# EAGLE board axiom_beta_plugin_module_TE0714_SDI_v0.4 (EAGLE 7.7.0)
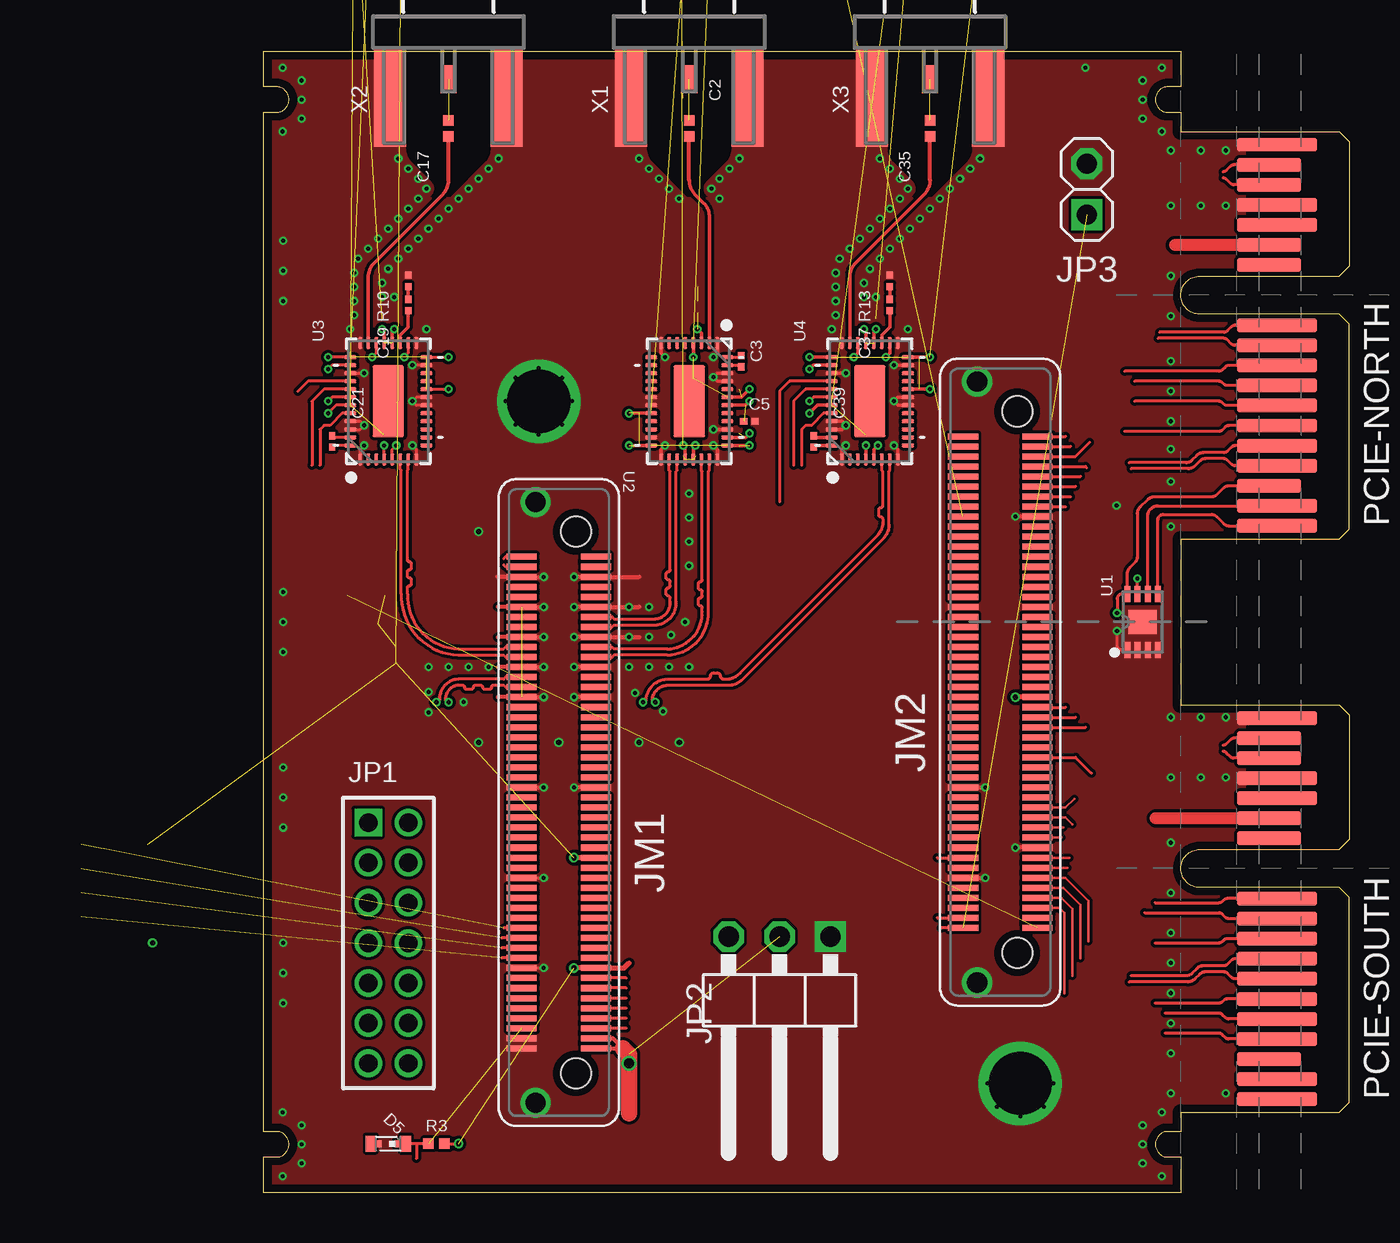
[diagram p0: board, top side]
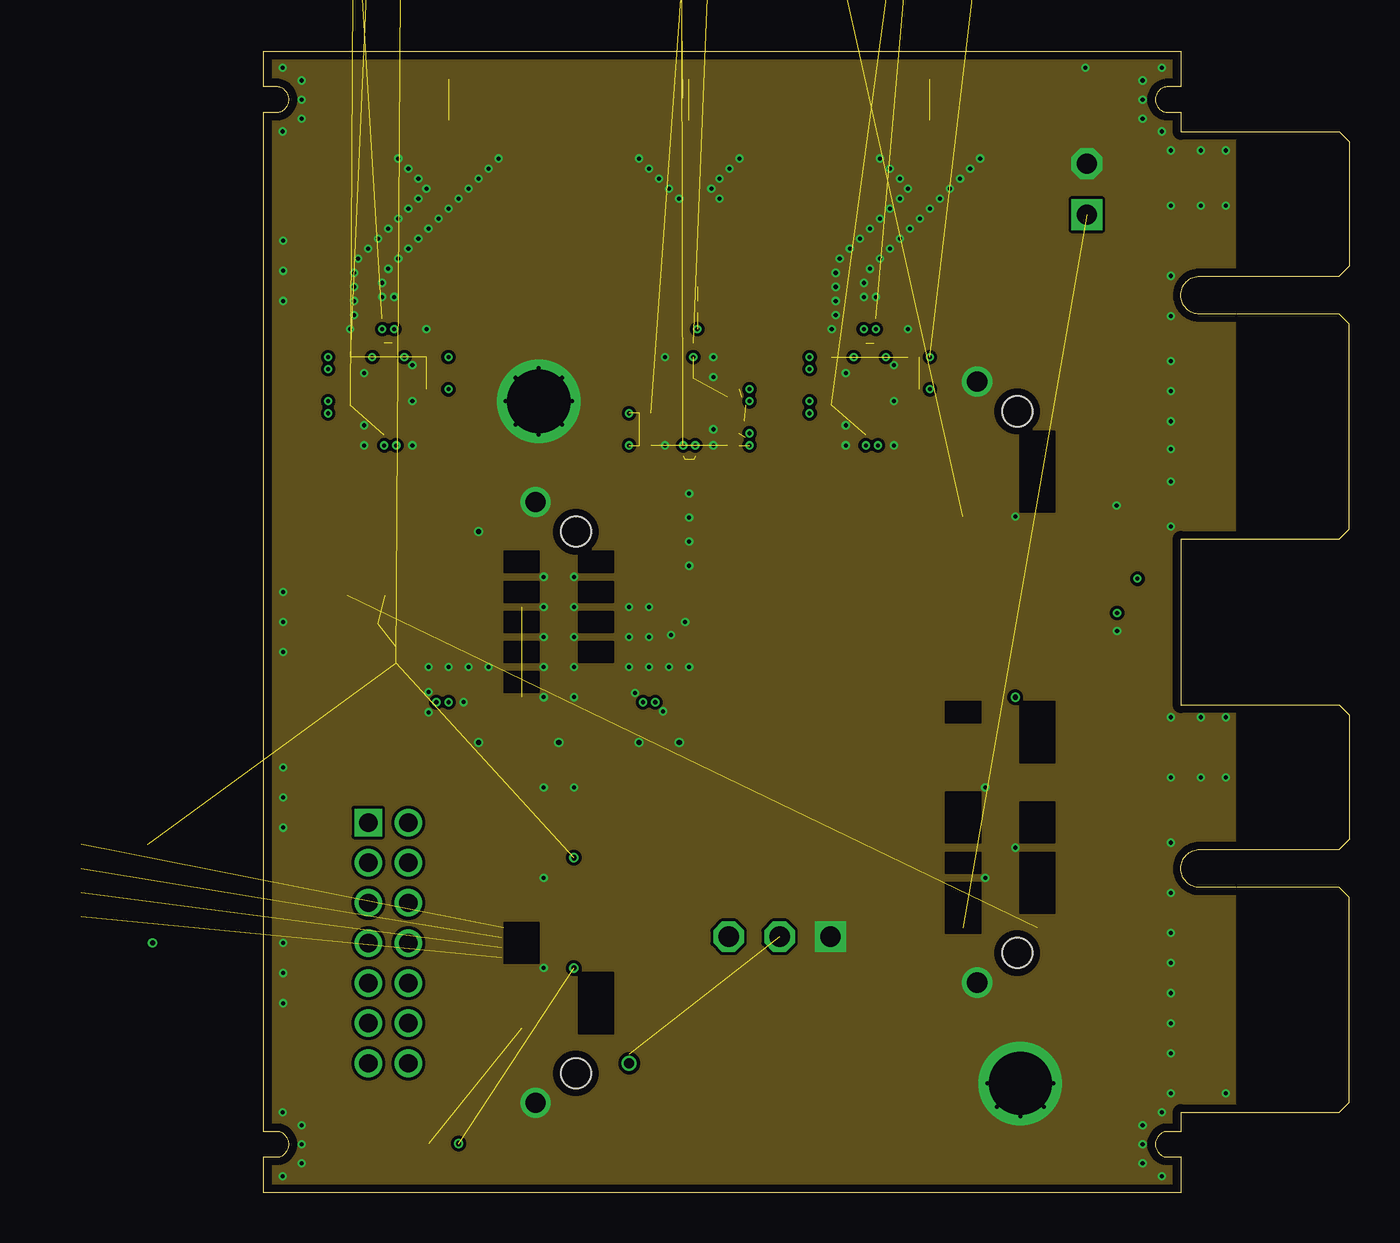
[diagram p1: board, inner layer Route2]
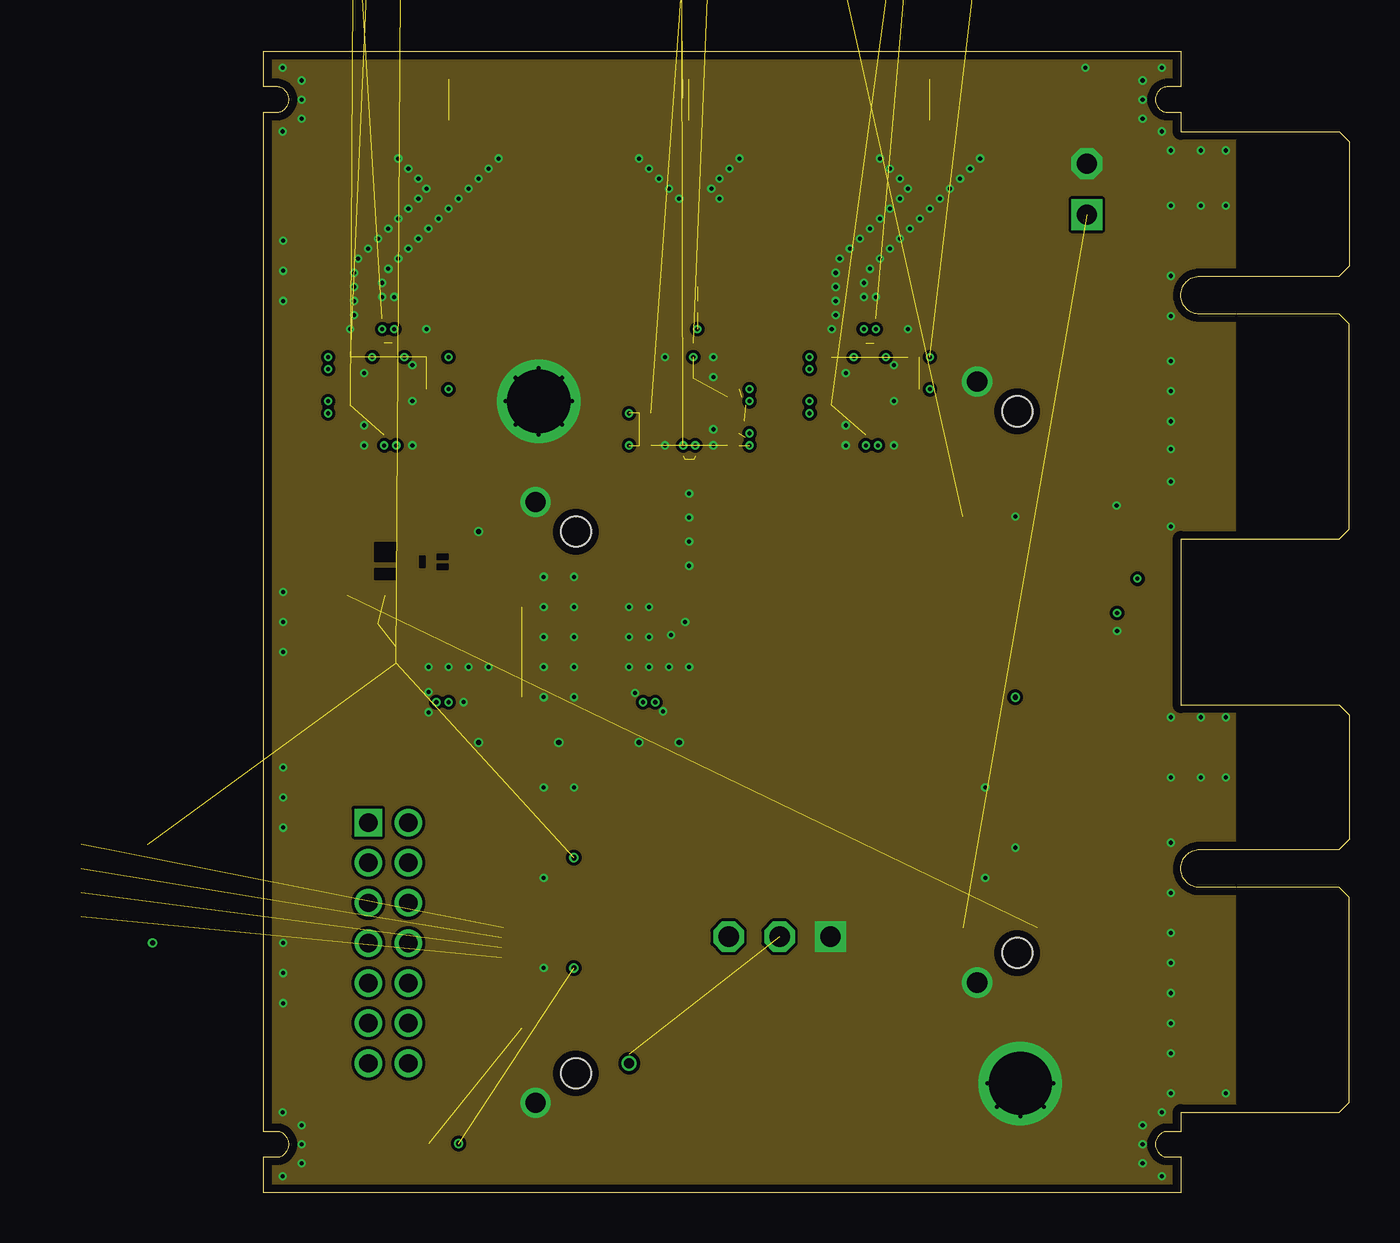
[diagram p2: board, inner layer Route15]
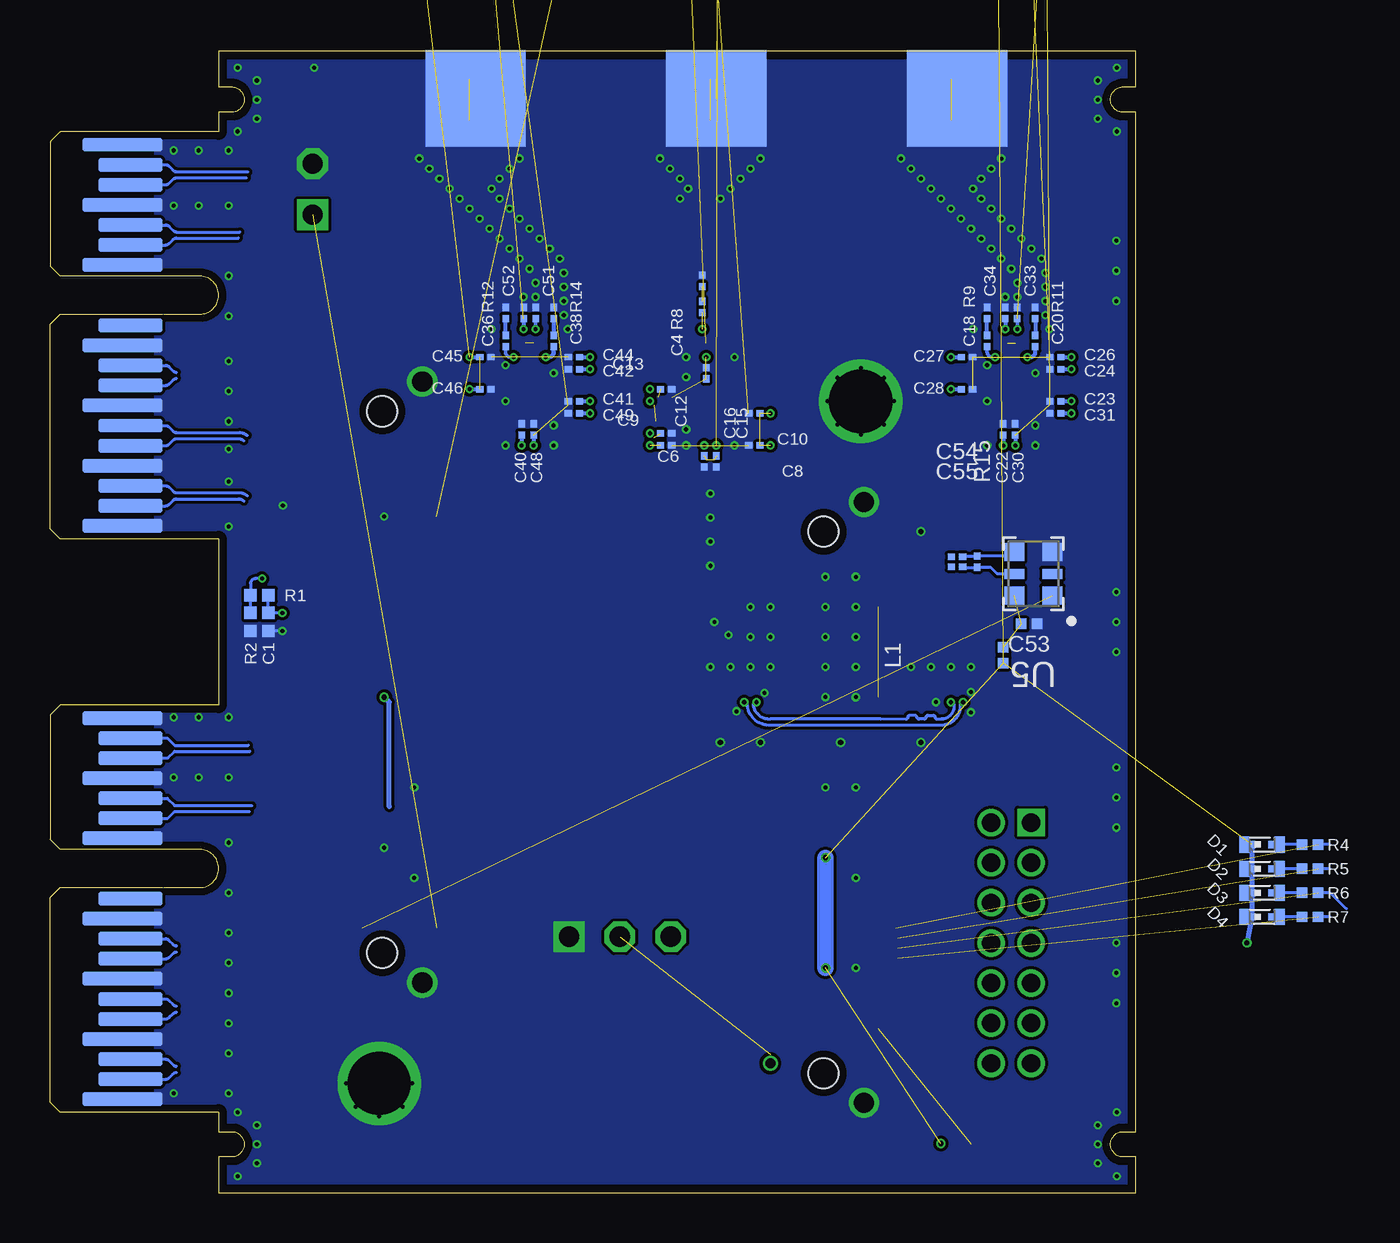
[diagram p3: board, bottom side, seen from below]

Size 54.12 x 56.9 mm. Coordinates in mm from the lower left corner, seen from the top.
Outline: 45.72,32.59 45.72,24.31
Outline: 45.72,52.89 45.72,53.85 45.09,53.85 arc-90 44.45,54.48 arc-90 45.09,55.12 45.72,55.12 45.72,56.9 0,56.9 0,55.12 0.63,55.12 arc-90 1.27,54.48 arc-90 0.63,53.85 0,53.85 0,3.05 0.63,3.05 arc-90 1.27,2.41 arc-90 0.63,1.78 0,1.78 0,0 45.72,0 45.72,1.78 45.09,1.78 arc-90 44.45,2.41 arc-90 45.09,3.05 45.72,3.05 45.72,4.01
Copper layers (1*2*15*16): Top 0.035559375mm / dielectric 0.17018125mm / Route2 0.01778125mm / dielectric 47mil / Route15 0.01778125mm / dielectric 0.17018125mm / Bottom 0.035559375mm
Design rules "OSHPark-4layer-tuned *": minimum track width 5mil, minimum drill 10mil, track to track 5mil, track to pad 5mil, pad to pad 5mil, via to via 5mil, smd to smd 5mil, copper to edge 15mil, drill to drill 6mil, minimum pad ring 4mil, minimum via ring 4mil, stop-mask expansion 2mil, vias tented up to drill 25mil, thermal gap 6mil
Net classes: 0 default: width 0.152 mm, drill 0.203 mm, clearance 0.152 mm; 1 LVDS: width 0.152 mm, drill 0.254 mm, clearance 0.152 mm; 2 75Ohm: width 0.178 mm, drill 0.203 mm, clearance 0.254 mm; 3 MGT: width 0.152 mm, drill 0.203 mm, clearance 0.356 mm
tKeepout: area 43.5,52.9 to 46.7,56.1; area 43.5,0.8 to 46.7,4; area -1,52.9 to 2.2,56.1; area -1,0.8 to 2.2,4
bKeepout: area 43.5,52.9 to 46.7,56.1; area 43.5,0.8 to 46.7,4; area -1,52.9 to 2.2,56.1; area -1,0.8 to 2.2,4

## Footprints (pad centres in the part's own frame; a part is rotated, then mirrored left to right if it is on the bottom)
0402-B = smd 0.62 x 0.62: 1 -0.45,0; 2 0.45,0
0402-C = smd 0.52 x 0.52: 1 -0.4,0; 2 0.4,0
0201-C = smd 0.36 x 0.32: 1 -0.28,0; 2 0.28,0
SMARTLED-TTW = smd 0.8 x 0.5: A 0,-0.875; C 0,0.875 | smd 0.35 x 0.35: A@1 0,-0.5; C@1 0,0.5
LSHM-150-XX.X-XX-DV-A-S = smd 0.3 x 1.5: 1 12.25,-1.85; 2 12.25,1.85; 3 11.75,-1.85; 4 11.75,1.85; 5 11.25,-1.85; 6 11.25,1.85; 7 10.75,-1.85; 8 10.75,1.85; 9 10.25,-1.85; 10 10.25,1.85; 11 9.75,-1.85; 12 9.75,1.85; 13 9.25,-1.85; 14 9.25,1.85; 15 8.75,-1.85; 16 8.75,1.85; 17 8.25,-1.85; 18 8.25,1.85; 19 7.75,-1.85; 20 7.75,1.85; 21 7.25,-1.85; 22 7.25,1.85; 23 6.75,-1.85; 24 6.75,1.85; 25 6.25,-1.85; 26 6.25,1.85; 27 5.75,-1.85; 28 5.75,1.85; 29 5.25,-1.85; 30 5.25,1.85; 31 4.75,-1.85; 32 4.75,1.85; 33 4.25,-1.85; 34 4.25,1.85; 35 3.75,-1.85; 36 3.75,1.85; 37 3.25,-1.85; 38 3.25,1.85; 39 2.75,-1.85; 40 2.75,1.85; 41 2.25,-1.85; 42 2.25,1.85; 43 1.75,-1.85; 44 1.75,1.85; 45 1.25,-1.85; 46 1.25,1.85; 47 0.75,-1.85; 48 0.75,1.85; 49 0.25,-1.85; 50 0.25,1.85; 51 -0.25,-1.85; 52 -0.25,1.85; 53 -0.75,-1.85; 54 -0.75,1.85; 55 -1.25,-1.85; 56 -1.25,1.85; 57 -1.75,-1.85; 58 -1.75,1.85; 59 -2.25,-1.85; 60 -2.25,1.85; 61 -2.75,-1.85; 62 -2.75,1.85; 63 -3.25,-1.85; 64 -3.25,1.85; 65 -3.75,-1.85; 66 -3.75,1.85; 67 -4.25,-1.85; 68 -4.25,1.85; 69 -4.75,-1.85; 70 -4.75,1.85; 71 -5.25,-1.85; 72 -5.25,1.85; 73 -5.75,-1.85; 74 -5.75,1.85; 75 -6.25,-1.85; 76 -6.25,1.85; 77 -6.75,-1.85; 78 -6.75,1.85; 79 -7.25,-1.85; 80 -7.25,1.85; 81 -7.75,-1.85; 82 -7.75,1.85; 83 -8.25,-1.85; 84 -8.25,1.85; 85 -8.75,-1.85; 86 -8.75,1.85; 87 -9.25,-1.85; 88 -9.25,1.85; 89 -9.75,-1.85; 90 -9.75,1.85; 91 -10.25,-1.85; 92 -10.25,1.85; 93 -10.75,-1.85; 94 -10.75,1.85; 95 -11.25,-1.85; 96 -11.25,1.85; 97 -11.75,-1.85; 98 -11.75,1.85; 99 -12.25,-1.85; 100 -12.25,1.85 | drill 1 pad 1.5: F1 14.975,1.15; F2 -14.975,1.15 | hole 1.5: -13.5,-0.85; 13.5,-0.85
2X07M = drill 0.914 square: 1 -6,-1 | drill 0.914: 2 -6,1; 3 -4,-1; 4 -4,1; 5 -2,-1; 6 -2,1; 7 0,-1; 8 0,1; 9 2,-1; 10 2,1; 11 4,-1; 12 4,1; 13 6,-1; 14 6,1
1X03/90-S = drill 1.016 square: 1 -2.54,-3.81 | drill 1.016 octagon: 2 0,-3.81; 3 2.54,-3.81
1X02-S = drill 1.016 square: 1 -1.27,0 | drill 1.016 octagon: 2 1.27,0
PCIE-36-AXIOM = smd 0.7 x 4 bottom: A1 -11.5,3.6; A4 -8.5,3.6; A7 -5.5,3.6; A10 -2.5,3.6; A12 1.5,3.6; A15 4.5,3.6; A18 7.5,3.6 | smd 0.7 x 3.2 bottom: A2 -10.5,4; A3 -9.5,4; A5 -7.5,4; A6 -6.5,4; A8 -4.5,4; A9 -3.5,4; A11 -1.5,4; A13 2.5,4; A14 3.5,4; A16 5.5,4; A17 6.5,4 | smd 0.7 x 4: B1 -11.5,3.6; B2 -10.5,3.6; B4 -8.5,3.6; B5 -7.5,3.6; B6 -6.5,3.6; B7 -5.5,3.6; B8 -4.5,3.6; B9 -3.5,3.6; B10 -2.5,3.6; B11 -1.5,3.6; B14 3.5,3.6; B15 4.5,3.6; B18 7.5,3.6 | smd 0.7 x 3.2: B3 -9.5,4; B12 1.5,4; B13 2.5,4; B16 5.5,4; B17 6.5,4
DFN200X300X100-9N = smd 0.813 x 0.305: 1 -1.397,0.762; 2 -1.397,0.254; 3 -1.397,-0.254; 4 -1.397,-0.762; 5 1.397,-0.762; 6 1.397,-0.254; 7 1.397,0.254; 8 1.397,0.762 | smd 1.194 x 1.397: EP 0,0
UQFN40P600X400X100-41N = smd 0.6 x 0.2: 1 -2.9,1.4; 2 -2.9,1; 3 -2.9,0.6; 4 -2.9,0.2; 5 -2.9,-0.2; 6 -2.9,-0.6; 7 -2.9,-1; 8 -2.9,-1.4; 21 2.9,-1.4; 22 2.9,-1; 23 2.9,-0.6; 24 2.9,-0.2; 25 2.9,0.2; 26 2.9,0.6; 27 2.9,1; 28 2.9,1.4 | smd 0.2 x 0.6: 9 -2.2,-1.9; 10 -1.8,-1.9; 11 -1.4,-1.9; 12 -1,-1.9; 13 -0.6,-1.9; 14 -0.2,-1.9; 15 0.2,-1.9; 16 0.6,-1.9; 17 1,-1.9; 18 1.4,-1.9; 19 1.8,-1.9; 20 2.2,-1.9; 29 2.2,1.9; 30 1.8,1.9; 31 1.4,1.9; 32 1,1.9; 33 0.6,1.9; 34 0.2,1.9; 35 -0.2,1.9; 36 -0.6,1.9; 37 -1,1.9; 38 -1.4,1.9; 39 -1.8,1.9; 40 -2.2,1.9 | smd 3.6 x 1.58: EP 0,0
3.2X2.5 = smd 0.9 x 1: 1 -1.075,-0.95; 3 1.075,-0.95; 4 1.075,0.95; 6 -1.075,0.95 | smd 0.5 x 1: 2 0,-0.95; 5 0,0.95
HDBNC_EDGE_2SIDE = smd 1.4 x 0.8: 1 -1.55,0 | smd 4.8 x 1.6: 2@1 -2.5,-2.9; 2@2 -2.5,2.9 | smd 4.8 x 5 bottom: 2@3 -2.5,0.3

## Placement (x,y rotation side)
C1  [0402-B]  43.24,28.45 270 bottom
C2  4u7  [0402-C]  21.22,53.05 270 top
C3  470n  [0201-C]  23.82,41.45 90 top
C4  4u7  [0201-C]  21.62,44.15 90 bottom
C5  10u  [0201-C]  24.22,38.45 0 top
C6  10u  [0201-C]  23.42,37.85 0 bottom
C7  10u  [0402-C]  20.58,86.41 180 top  (outside the outline)
C8  100n  [0201-C]  19.02,37.25 180 bottom
C9  100n  [0201-C]  23.42,37.25 0 bottom
C10  100n  [0201-C]  19.02,38.85 180 bottom
C11  10u  [0402-C]  20.94,83.23 180 top  (outside the outline)
C12  10u  [0201-C]  21.42,40.85 90 bottom
C13  1u  [0201-C]  23.42,40.05 0 bottom
C14  10u  [0402-C]  20.38,91.13 180 top  (outside the outline)
C15  100n  [0201-C]  20.92,36.45 270 bottom
C16  100n  [0201-C]  21.52,36.45 270 bottom
C17  4u7  [0402-C]  9.22,53.05 90 top
C18  4u7  [0201-C]  7.42,42.45 90 bottom
C19  4u7  [0201-C]  7.22,44.25 90 top
C20  4u7  [0201-C]  5.02,42.45 90 bottom
C21  470n  [0201-C]  3.42,37.45 270 top
C22  100n  [0201-C]  6.62,38.05 90 bottom
C23  10u  [0201-C]  4.02,39.45 180 bottom
C24  10u  [0201-C]  4.02,41.05 180 bottom
C25  10u  [0402-C]  3.49,88.44 180 top  (outside the outline)
C26  100n  [0201-C]  4.02,41.65 180 bottom
C27  100n  [0201-C]  8.42,41.65 0 bottom
C28  100n  [0201-C]  8.42,40.05 0 bottom
C29  10u  [0402-C]  2.86,93.06 180 top  (outside the outline)
C30  10u  [0201-C]  6.02,38.05 90 bottom
C31  1u  [0201-C]  4.02,38.85 180 bottom
C32  10u  [0402-C]  3.06,96.67 0 top  (outside the outline)
C33  100n  [0201-C]  5.92,43.85 90 bottom
C34  100n  [0201-C]  6.52,43.85 90 bottom
C35  4u7  [0402-C]  33.22,53.05 90 top
C36  4u7  [0201-C]  31.42,42.45 90 bottom
C37  4u7  [0201-C]  31.22,44.25 90 top
C38  4u7  [0201-C]  29.02,42.45 90 bottom
C39  470n  [0201-C]  27.42,37.45 270 top
C40  100n  [0201-C]  30.62,38.05 90 bottom
C41  10u  [0201-C]  28.02,39.45 180 bottom
C42  10u  [0201-C]  28.02,41.05 180 bottom
C43  10u  [0402-C]  36.3,92.04 180 top  (outside the outline)
C44  100n  [0201-C]  28.02,41.65 180 bottom
C45  100n  [0201-C]  32.42,41.65 0 bottom
C46  100n  [0201-C]  32.42,40.05 0 bottom
C47  10u  [0402-C]  35.66,96.66 180 top  (outside the outline)
C48  10u  [0201-C]  30.02,38.05 90 bottom
C49  1u  [0201-C]  28.02,38.85 180 bottom
C50  10u  [0402-C]  35.86,100.27 0 top  (outside the outline)
C51  100n  [0201-C]  29.92,43.85 90 bottom
C52  100n  [0201-C]  30.52,43.85 90 bottom
C53  470n  [0402-C]  5.32,28.35 0 bottom
C54  100n  [0201-C]  8.92,31.7 180 bottom
C55  100n  [0201-C]  8.92,31.2 180 bottom
D1  [SMARTLED-TTW]  -6.28,17.35 270 bottom  (outside the outline)
D2  [SMARTLED-TTW]  -6.28,16.15 270 bottom  (outside the outline)
D3  [SMARTLED-TTW]  -6.28,14.95 270 bottom  (outside the outline)
D4  [SMARTLED-TTW]  -6.28,13.75 270 bottom  (outside the outline)
D5  [SMARTLED-TTW]  6.22,2.45 90 top
FB1  [0402-C]  23.12,86.13 180 top  (outside the outline)
FB2  [0402-C]  23.48,82.95 180 top  (outside the outline)
FB3  [0402-C]  23.2,91.21 180 top  (outside the outline)
FB4  [0402-C]  5.95,88.19 0 top  (outside the outline)
FB5  [0402-C]  5.05,93.06 180 top  (outside the outline)
FB6  [0402-C]  6.67,97.25 180 top  (outside the outline)
FB7  [0402-C]  38.75,91.79 0 top  (outside the outline)
FB8  [0402-C]  37.84,96.66 180 top  (outside the outline)
FB9  [0402-C]  39.48,100.85 180 top  (outside the outline)
JM1  LSHM-150-XX.X-XX-DV-A-S  [LSHM-150-XX.X-XX-DV-A-S]  14.72,19.45 90 top
JM2  LSHM-150-XX.X-XX-DV-A-S  [LSHM-150-XX.X-XX-DV-A-S]  36.72,25.45 90 top
JP1  [2X07M]  6.22,12.45 270 top
JP2  [1X03/90-S]  25.72,8.95 180 top
JP3  [1X02-S]  41.04,50.02 90 top
L1  [0402-C]  6.62,26.8 90 bottom
LOGO2  OSHW_LOGO_FILLX0100-NT  [OSHW_FILLX100_NOTEXT]  38.11,-33.91 90 bottom  (outside the outline)
PCIE-NORTH  PCIE-36-AXIOM  [PCIE-36-AXIOM]  54.12,44.74 90 top
PCIE-SOUTH  PCIE-36-AXIOM  [PCIE-36-AXIOM]  54.12,16.16 90 top
R1  10k  [0402-B]  43.69,29.78 180 bottom
R2  1k  [0402-B]  44.13,28.45 270 bottom
R3  10k  [0402-C]  8.62,2.45 0 top
R4  10k  [0402-C]  -8.68,17.35 180 bottom  (outside the outline)
R5  10k  [0402-C]  -8.68,16.15 180 bottom  (outside the outline)
R6  10k  [0402-C]  -8.68,14.95 180 bottom  (outside the outline)
R7  10k  [0402-C]  -8.68,13.75 180 bottom  (outside the outline)
R8  [0201-C]  21.62,45.45 90 bottom
R9  75R  [0201-C]  7.42,43.85 90 bottom
R10  75R  [0201-C]  7.22,45.45 90 top
R11  75R  [0201-C]  5.02,43.85 90 bottom
R12  75R  [0201-C]  31.42,43.85 90 bottom
R13  75R  [0201-C]  31.22,45.45 90 top
R14  75R  [0201-C]  29.02,43.85 90 bottom
R15  100R  [0201-C]  7.92,31.45 270 bottom
U1  BR24G04NUX  [DFN200X300X100-9N]  43.81,28.45 90 top
U2  GS12241  [UQFN40P600X400X100-41N]  21.22,39.45 270 top
U3  GS12281  [UQFN40P600X400X100-41N]  6.22,39.45 90 top
U4  GS12281  [UQFN40P600X400X100-41N]  30.22,39.45 90 top
U5  DSC11XX-3.2X2.5  [3.2X2.5]  5.12,30.85 90 bottom
X1  HDBNC  [HDBNC_EDGE_2SIDE]  21.22,57.05 90 top
X2  HDBNC  [HDBNC_EDGE_2SIDE]  9.22,57.05 90 top
X3  HDBNC  [HDBNC_EDGE_2SIDE]  33.22,57.05 90 top

## Library data of the parts
C1-C55 FB1-FB9 L1 R1-R15 = generic-rcl
D1-D5 = led
JM1 JM2 = LSHM-150-XX.X-XX-DV-A-S
JP1-JP3 = pinhead-2
LOGO2 = ohw-logo
PCIE-NORTH PCIE-SOUTH = PCIe
U1 = eeprom
U2-U4 = gs122xx
U5 = dsc11xx
X1-X3 = hdbnc

## Nets
1V8 [LVDS]: FB1.1 FB2.1 FB3.1 FB4.1 FB5.1 FB7.1 FB8.1 JM2.18
3V3 [LVDS]: D1.A@1 D2.A@1 D3.A@1 D4.A@1 FB6.1 FB9.1 JM1.83 L1.1 R3.2
ADC_N: JM1.27
ADC_P: JM1.25
B14_L0: JM2.99 U5.1
B14_L4_N: JM2.57
B14_L4_P: JM2.55
B14_L5_N: JM2.58
B14_L5_P: JM2.56
B14_L7_N: JM2.59
B14_L7_P: JM2.61
B14_L8_N: JM2.62
B14_L8_P: JM2.60
B14_L9_N: JM2.66
B14_L9_P: JM2.64
B14_L10_N: JM2.77
B14_L10_P: JM2.75
B14_L11_N: JM2.74
B14_L11_P: JM2.76
B14_L12_N: JM2.84
B14_L12_P: JM2.82
B14_L13_N: JM2.86
B14_L13_P: JM2.88
B14_L14_N: JM2.78
B14_L14_P: JM2.80
B14_L15_N: JM2.65
B14_L15_P: JM2.63
B14_L16_N: JM2.81
B14_L16_P: JM2.79
B14_L17_N: JM2.89
B14_L17_P: JM2.91
B14_L18_N: JM2.85
B14_L18_P: JM2.87
B14_L19_N: JM2.94
B14_L19_P: JM2.92
B14_L20_N: JM2.95
B14_L20_P: JM2.93
B14_L21_N: JM1.95
B14_L21_P: JM1.93
B14_L22_N: JM2.96
B14_L22_P: JM2.98
B14_L23_N: JM1.89
B14_L23_P: JM1.91
B14_L24_N: JM1.85
B14_L24_P: JM1.87
B14_L25: JM2.97
B15_L1_N: JM2.14
B15_L1_P: JM2.16
B15_L2_N: JM2.20
B15_L2_P: JM2.22
B15_L3_N: JM2.4
B15_L3_P: JM2.2
B15_L4_N: JM2.10
B15_L4_P: JM2.12
B15_L5_N: JM2.8
B15_L5_P: JM2.6
B15_L6_N: JM2.26
B15_L6_P: JM2.24
B15_L7_N: JM2.1
B15_L7_P: JM2.3
B15_L8_N: JM2.7
B15_L8_P: JM2.5
B15_L9_N: JM2.15
B15_L9_P: JM2.13
B15_L10_N: JM2.11
B15_L10_P: JM2.9
B15_L11_N: JM2.30
B15_L11_P: JM2.28
B15_L12_N: JM2.34
B15_L12_P: JM2.32
B15_L13_N: JM2.38
B15_L13_P: JM2.40
B15_L14_N: JM2.42
B15_L14_P: JM2.44
B15_L15_N: JM2.19
B15_L15_P: JM2.21
B15_L16_N: JM2.23
B15_L16_P: JM2.25
B15_L17_N: JM2.31
B15_L17_P: JM2.33
B15_L18_N: JM2.27
B15_L18_P: JM2.29
B15_L19_N: JM2.41
B15_L19_P: JM2.43
B15_L20_N: JM2.50
B15_L20_P: JM2.52
B15_L21_N: JM2.45
B15_L21_P: JM2.47
B15_L22_N: JM2.46
B15_L22_P: JM2.48
B15_L23_N: JM2.51
B15_L23_P: JM2.49
B15_L24_N: JM2.37
B15_L24_P: JM2.39
B34_L1_N: JM1.37
B34_L1_P: JM1.35
B34_L2_N: JM1.33
B34_L2_P: JM1.31
B34_L3_N: JM1.42
B34_L3_P: JM1.40
B34_L4_N: JM1.41
B34_L4_P: JM1.39
B34_L5_N: JM1.45
B34_L5_P: JM1.43
B34_L6_N: JM1.34
B34_L6_P: JM1.32
B34_L7_N: JM1.38
B34_L7_P: JM1.36
B34_L8_N: JM1.52
B34_L8_P: JM1.50
B34_L9_N: JM1.46
B34_L9_P: JM1.44
B34_L10_N: JM1.51
B34_L10_P: JM1.49
B34_L11_N: JM1.53
B34_L11_P: JM1.55
B34_L12_N: JM1.57
B34_L12_P: JM1.59
B34_L13_N: JM1.56
B34_L13_P: JM1.54
B34_L14_N: JM1.60
B34_L14_P: JM1.58
B34_L15_N: JM1.62
B34_L15_P: JM1.64
B34_L16_N: JM1.68
B34_L16_P: JM1.70
B34_L17_N: JM1.63
B34_L17_P: JM1.65
B34_L18_N: JM1.74
B34_L18_P: JM1.72
B34_L19_N: JM1.71
B34_L19_P: JM1.73
B34_L20_N: JM1.76 R4.1
B34_L20_P: JM1.78 R5.1
B34_L21_N: JM1.69
B34_L21_P: JM1.67
B34_L22_N: JM1.75
B34_L22_P: JM1.77
B34_L23_N: JM1.79
B34_L23_P: JM1.81
B34_L24_N: JM1.80 R6.1
B34_L24_P: JM1.82 R7.1
BOOTMODE: JM2.100 JP3.1
CLK0_N: C55.2
CLK0_P: C54.2
DONE: D5.A@1 JM1.96 R3.1
GND: C1.2 C5.2 C6.2 C7.2 C8.2 C9.2 C10.2 C11.2 C12.2 C13.2 C14.2 C15.2 C16.2 C22.2 C23.2 C24.2 C25.2 C26.2 C27.2 C28.2 C29.2 C30.2 C31.2 C32.2 C33.2 C34.2 C40.2 C41.2 C42.2 C43.2 C44.2 C45.2 C46.2 C47.2 C48.2 C49.2 C50.2 C51.2 C52.2 C53.2 D5.C@1 JM1.5 JM1.6 JM1.11 JM1.12 JM1.17 JM1.18 JM1.23 JM1.24 JM1.29 JM1.30 JM1.47 JM1.48 JM1.66 JM1.84 JM1.98 JM1.100 JM1.F1 JM1.F2 JM2.17 JM2.35 JM2.36 JM2.72 JM2.83 JM2.90 JM2.F1 JM2.F2 JP2.1 JP3.2 PCIE-NORTH.A1 PCIE-NORTH.A4 PCIE-NORTH.A7 PCIE-NORTH.A10 PCIE-NORTH.A12 PCIE-NORTH.A15 PCIE-NORTH.A18 PCIE-NORTH.B15 PCIE-NORTH.B18 PCIE-SOUTH.A1 PCIE-SOUTH.A4 PCIE-SOUTH.A7 PCIE-SOUTH.A10 PCIE-SOUTH.A12 PCIE-SOUTH.A15 PCIE-SOUTH.A18 PCIE-SOUTH.B15 PCIE-SOUTH.B18 R2.2 R8.2 R9.2 R10.2 R11.2 R12.2 R13.2 R14.2 U1.1 U1.2 U1.3 U1.4 U1.EP U2.1 U2.8 U2.14 U2.15 U2.19 U2.21 U2.28 U2.31 U2.37 U2.38 U3.1 U3.8 U3.14 U3.15 U3.19 U3.21 U3.28 U3.31 U3.37 U3.38 U4.1 U4.8 U4.14 U4.15 U4.19 U4.21 U4.28 U4.31 U4.37 U4.38 U5.3 X1.2@1 X1.2@2 X1.2@3 X2.2@1 X2.2@2 X2.2@3 X3.2@1 X3.2@2 X3.2@3
I2C_V: C1.1 PCIE-NORTH.B3 R1.1 U1.8
MGT_CLK0_N [MGT]: JM1.4
MGT_CLK0_P [MGT]: JM1.2
MGT_RX0_N [MGT]: JM1.21 U2.27
MGT_RX0_P [MGT]: JM1.19 U2.26
MGT_RX1_N [MGT]: JM1.15 U2.23
MGT_RX1_P [MGT]: JM1.13 U2.22
MGT_RX2_N [MGT]: JM1.9
MGT_RX2_P [MGT]: JM1.7
MGT_RX3_N [MGT]: JM1.3
MGT_RX3_P [MGT]: JM1.1
MGT_TX0_N [MGT]: JM1.28 U4.6
MGT_TX0_P [MGT]: JM1.26 U4.7
MGT_TX1_N [MGT]: JM1.22 U3.6
MGT_TX1_P [MGT]: JM1.20 U3.7
MGT_TX2_N [MGT]: JM1.16
MGT_TX2_P [MGT]: JM1.14
MGT_TX3_N [MGT]: JM1.10
MGT_TX3_P [MGT]: JM1.8
N$1 [LVDS]: D1.C@1 R4.2
N$2 [LVDS]: D2.C@1 R5.2
N$3 [LVDS]: D3.C@1 R6.2
N$4 [LVDS]: D4.C@1 R7.2
N$7: C3.2 U2.40
N$8: C3.1 U2.39
N$9: C21.2 U3.40
N$10: C21.1 U3.39
N$11: C6.1 U2.30
N$12: C5.1 U2.34
N$13: C18.2 R9.1
N$14: C18.1 U3.22
N$15 [75Ohm]: C19.1 U3.23
N$16: C19.2 R10.1
N$17: C20.1 U3.26
N$18: C20.2 R11.1
N$19: C4.2 R8.1
N$20: C4.1 U2.3
N$21: C24.1 U3.30
N$22: C23.1 U3.34
N$23 [75Ohm]: C17.1 U3.27
N$24: C22.1 U3.5
N$25: C17.2 X2.1
N$26: U3.17
N$27: U3.18
N$28: U3.33
N$29: U3.36
N$30: U3.12
N$31: U3.11
N$32: U3.13
N$33: U3.10
N$34: U3.32
N$37 [75Ohm]: C2.2 U2.2
N$38: C2.1 X1.1
N$39: U2.10
N$40: U2.13
N$41: U2.11
N$42: U2.12
N$43: U2.17
N$44: U2.18
N$45: U2.33
N$46: U2.36
N$58 [75Ohm]: C35.1 U4.27
N$59: C35.2 X3.1
N$78: C39.2 U4.40
N$81: U4.32
N$82: U4.10
N$83: U4.13
N$84: U4.11
N$85: U4.12
N$86: U4.36
N$87: U4.33
N$88: U4.18
N$89: U4.17
N$90: C40.1 U4.5
N$91: C41.1 U4.34
N$92: C42.1 U4.30
N$93: C38.2 R14.1
N$94: C38.1 U4.26
N$95: C37.2 R13.1
N$96 [75Ohm]: C37.1 U4.23
N$97: C36.1 U4.22
N$98: C36.2 R12.1
N$99: C39.1 U4.39
N$209: PCIE-NORTH.A11
N$216: R1.2 R2.1 U1.7
N$256: PCIE-SOUTH.A11
N_5V: PCIE-NORTH.B12
N_IO0: PCIE-NORTH.B4
N_IO1: PCIE-NORTH.B5
N_IO2: PCIE-NORTH.B6
N_IO3: PCIE-NORTH.B7
N_IO4 [LVDS]: PCIE-NORTH.B8
N_IO5 [LVDS]: PCIE-NORTH.B9
N_IO6: PCIE-NORTH.B10
N_IO7: PCIE-NORTH.B11
N_LVDS0_N: PCIE-NORTH.A3
N_LVDS0_P: PCIE-NORTH.A2
N_LVDS1_N: PCIE-NORTH.A6
N_LVDS1_P: PCIE-NORTH.A5
N_LVDS2_N: PCIE-NORTH.A9
N_LVDS2_P: PCIE-NORTH.A8
N_LVDS3_N: PCIE-NORTH.A14
N_LVDS3_P: PCIE-NORTH.A13
N_LVDS4_N: PCIE-NORTH.A17
N_LVDS4_P: PCIE-NORTH.A16
N_LVDS5_N: PCIE-NORTH.B17
N_LVDS5_P: PCIE-NORTH.B16
N_PCIE_V: PCIE-NORTH.B13
N_VCCIO: PCIE-NORTH.B14
OUT_N: C55.1 R15.2 U5.5
OUT_P: C54.1 R15.1 U5.4
PROG_B: JM1.94
S_5V: PCIE-SOUTH.B12
S_IO0: PCIE-SOUTH.B4
S_IO1: PCIE-SOUTH.B5
S_IO2 [LVDS]: PCIE-SOUTH.B6
S_IO3: PCIE-SOUTH.B7
S_IO4: PCIE-SOUTH.B8
S_IO5: PCIE-SOUTH.B9
S_IO6: PCIE-SOUTH.B10
S_IO7 [LVDS]: PCIE-SOUTH.B11
S_LVDS0_N: PCIE-SOUTH.A3
S_LVDS0_P: PCIE-SOUTH.A2
S_LVDS1_N: PCIE-SOUTH.A6
S_LVDS1_P: PCIE-SOUTH.A5
S_LVDS2_N: PCIE-SOUTH.A9
S_LVDS2_P: PCIE-SOUTH.A8
S_LVDS3_N: PCIE-SOUTH.A14
S_LVDS3_P: PCIE-SOUTH.A13
S_LVDS4_N: PCIE-SOUTH.A17
S_LVDS4_P: PCIE-SOUTH.A16
S_LVDS5_N: PCIE-SOUTH.B17
S_LVDS5_P: PCIE-SOUTH.B16
S_PCIE_V: PCIE-SOUTH.B13
S_VCCIO: PCIE-SOUTH.B14
SCL: PCIE-NORTH.B2 U1.6
SDA: PCIE-NORTH.B1 U1.5
SPI-CLK: JM2.67
SPI-CS: JM2.69
SPI-DQ0: JM2.68
SPI-DQ1: JM2.71
SPI-DQ2: JM2.73
SPI-DQ3: JM2.70
TCK: JM1.90
TDI: JM1.86
TDO: JM1.88
TMS: JM1.92
VCC_4: C11.1 C12.1 C13.1 FB2.2 U2.4 U2.35
VCC_8: C29.1 C30.1 C31.1 FB5.2 U3.4 U3.35
VCC_9: C47.1 C48.1 C49.1 FB8.2 U4.4 U4.35
VCCIO0 [LVDS]: JM2.53
VCCIO15 [LVDS]: JM2.54
VCCIO34: JM1.61
VCCO_4: C14.1 C15.1 C16.1 FB3.2 U2.24 U2.25
VCCO_8: C32.1 C33.1 C34.1 FB6.2 U3.24 U3.25
VCCO_9: C50.1 C51.1 C52.1 FB9.2 U4.24 U4.25
VDD_4: C7.1 C8.1 C9.1 C10.1 FB1.2 U2.16 U2.20 U2.29
VDD_8: C25.1 C26.1 C27.1 C28.1 FB4.2 U3.16 U3.20 U3.29
VDD_9: C43.1 C44.1 C45.1 C46.1 FB7.2 U4.16 U4.20 U4.29
VIN [LVDS]: JM1.97 JM1.99 JP2.2
VSUP: JP2.3
VXX: C53.1 L1.2 U5.6

## Tracks (layer width: path | path; a pad name or v marks a point on that pad's centre or on a via)
1V8  (7 unrouted)
3V3  (via drill 0.25)  (5 unrouted)
  Top 0.152: R3.2 v9.72,2.45
  Top 0.254: v15.47,11.2 JM1.83 17.97,11.2 18.22,11.45
  Bottom 0.254: D1.A@1 D2.A@1 D3.A@1 D4.A@1 v-5.53,12.45
  Bottom 0.813: 15.47,16.7 v15.47,11.2
B14_L0  (1 unrouted)
  Bottom 0.14: 4.09,29.85 U5.1
B14_L4_N
  Top 0.152: JM2.57 40.47,23.7
B14_L4_P
  Top 0.152: JM2.55 39.97,24.2
B14_L7_N
  Top 0.152: JM2.59 40.97,23.2
B14_L10_N
  Top 0.127: JM2.77 39.97,18.7 40.3,18.36
B14_L10_P
  Top 0.127: JM2.75 39.97,19.2 40.41,19.63
B14_L13_N
  Top 0.152: 33.57,16.7 JM2.86
B14_L15_N
  Top 0.152: JM2.65 40.47,21.7 41.27,20.9
B14_L16_N
  Top 0.127: JM2.81 39.77,17.7
B14_L16_P
  Top 0.127: JM2.79 39.87,18.2
B14_L17_N
  Top 0.127: JM2.89 39.97,15.7 41.12,14.55 41.12,12.54
B14_L17_P
  Top 0.127: JM2.91 39.87,15.2 40.72,14.35 40.72,11.67
B14_L18_N
  Top 0.127: JM2.85 40.17,16.7
B14_L18_P
  Top 0.127: JM2.87 40.07,16.2
B14_L20_N
  Top 0.127: JM2.95 39.67,14.2 39.92,13.95 39.92,9.93
B14_L20_P
  Top 0.127: JM2.93 39.77,14.7 40.32,14.15 40.32,10.8
B14_L21_N
  Top 0.152: 18.07,8.2 JM1.95
B14_L21_P
  Top 0.152: 18.07,8.7 JM1.93
B14_L22_P
  Top 0.152: 33.57,13.7 JM2.98
B14_L23_N
  Top 0.152: 18.07,9.7 JM1.89
B14_L23_P
  Top 0.152: 18.07,9.2 JM1.91
B14_L24_N
  Top 0.152: 18.07,10.7 JM1.85
B14_L24_P
  Top 0.152: 18.07,10.2 JM1.87
B15_L7_N
  Top 0.152: JM2.1 39.97,37.7
B15_L7_P
  Top 0.152: JM2.3 40.22,37.2
B15_L8_N
  Top 0.152: JM2.7 40.97,36.2 41.02,36.14
B15_L8_P
  Top 0.152: JM2.5 40.47,36.7 41.19,37.41
B15_L9_N
  Top 0.152: JM2.15 39.97,34.2
B15_L9_P
  Top 0.152: JM2.13 40.22,34.7
B15_L10_N
  Top 0.152: JM2.11 40.47,35.2
B15_L10_P
  Top 0.152: JM2.9 40.72,35.7
B34_L20_N  (1 unrouted)
  Top 0.152: JM1.76 11.97,13.2
  Bottom 0.152: -9.68,17.35 R4.1
B34_L20_P  (1 unrouted)
  Top 0.152: JM1.78 11.87,12.7
  Bottom 0.152: -9.68,16.15 R5.1
B34_L24_N  (1 unrouted)
  Top 0.152: JM1.80 11.87,12.2
  Bottom 0.152: -10.48,14.15 -9.68,14.95 R6.1
B34_L24_P  (1 unrouted)
  Top 0.152: JM1.82 11.87,11.7
  Bottom 0.152: -9.68,13.75 R7.1
BOOTMODE  (1 unrouted)
  Top 0.152: JM2.100 33.77,13.2
DONE  (1 unrouted)
  Top 0.152: R3.1 7.62,2.45 | 7.62,2.45 D5.A@1 | 7.62,2.45 7.62,1.7
GND  (via drill 0.2, 0.25, 3.15)  (9 unrouted)
  Top 0.152: JM1.84 v13.97,11.2 | JM1.66 v13.97,15.7 | U1.1 42.8,27.05 arc-90 42.55,27.3 v42.55,28 | U3.19 v7.42,41.25 | U3.15 7.62,39.65 v7.42,39.45 7.62,39.25 U3.14 | U3.37 4.82,38.45 v5.02,38.25 4.82,38.05 U3.38 | U3.1 4.82,37.05 v5.02,37.25 | U3.31 v5.02,40.85 | U3.8 7.62,37.05 v7.42,37.25
  Top 0.178: U4.19 v31.42,41.25 | U4.15 31.62,39.65 v31.42,39.45 31.62,39.25 U4.14 | U4.37 28.82,38.45 v29.02,38.25 28.82,38.05 U4.38 | U4.1 28.82,37.05 v29.02,37.25 | U4.31 v29.02,40.85 | U4.8 31.62,37.05 v31.42,37.25 | U2.38 22.62,40.85 v22.42,40.65 22.62,40.45 U2.37 | U2.31 v22.42,38.05 | U2.1 22.62,41.85 v22.42,41.65 | U2.8 19.82,41.85 v20.02,41.65 | U2.28 22.62,37.05 v22.42,37.25 | U2.21 19.82,37.05 v20.02,37.25
  Top 0.2: JM2.90 v35.97,15.7 | JM2.83 v37.47,17.2 | JM2.17 v37.47,33.7 | JM1.48 v13.97,20.2 | JM1.47 v15.47,20.2 | v13.97,30.7 JM1.6 11.65,30.7 | JM1.12 v13.97,29.2 | JM1.18 v13.97,27.7 | JM1.24 v13.97,26.2 | JM1.30 v13.97,24.7 | JM1.29 v15.47,24.7 | JM1.23 v15.47,26.2 | v15.47,27.7 JM1.17 18.72,27.7 | v15.47,29.2 JM1.11 18.72,29.2 | v15.47,30.7 JM1.5 18.72,30.7 | JM2.72 v35.97,20.2
  Bottom 0.152: v42.55,28 C1.2
  Bottom 0.305: U5.3 4.17,31.85 4.12,31.9
  other vias: 13.72,39.45 37.72,5.45 12.07,39.45 15.37,39.45 13.72,37.8 13.72,41.1 36.07,5.45 39.37,5.45 37.72,3.8 36.55,4.28 38.89,4.28 12.55,38.28 14.89,40.61 14.89,38.28 12.55,40.61 18.72,22.45 20.72,22.45 14.72,22.45 10.72,22.45 10.72,32.95 44.77,0.83 43.81,1.46 43.81,2.41 43.81,3.37 44.77,4 44.77,56.07 44.77,52.9 43.81,53.53 43.81,55.44 43.81,54.48 0.95,56.07 0.95,0.83 40.96,56.07 0.95,4 0.95,52.9 1.91,53.53 1.91,55.44 1.91,1.46 1.91,3.37 1.91,54.48 1.91,2.41 47.97,49.2 47.97,51.95 47.97,23.7 47.97,20.7 0.98,47.45 0.98,44.45 0.98,45.95 0.98,29.95 0.98,26.95 0.98,28.45 0.98,21.2 0.98,18.2 0.98,19.7 0.98,12.45 0.98,9.45 0.98,10.95 45.22,6.95 45.22,11.45 45.22,12.95 45.22,17.45 45.22,14.95 45.22,35.45 45.22,39.95 45.22,43.7 45.22,41.45 45.22,45.7 45.22,23.7 45.22,20.7 45.22,51.95 45.22,37.07 46.72,49.2 46.72,23.7 46.72,20.7 46.72,51.95 45.22,49.2 45.22,4.95 45.22,8.45 45.22,33.2 47.97,4.95 45.22,38.45 45.22,9.95 42.52,34.25 5.92,45.35 6.72,46.55 4.72,46.55 5.22,47.05 5.72,47.55 6.22,48.05 6.72,51.55 7.22,51.05 7.72,50.55 8.12,50.05 7.72,49.55 7.22,49.05 6.72,48.55 4.52,45.85 4.52,45.15 4.52,44.45 4.52,43.75 7.22,47.05 7.72,47.55 8.22,48.05 8.72,48.55 9.22,49.05 9.72,49.55 10.22,50.05 10.72,50.55 11.22,51.05 11.72,51.55 5.92,44.65 30.22,46.05 30.72,46.55 28.72,46.55 29.22,47.05 29.72,47.55 30.22,48.05 30.72,51.55 31.22,51.05 31.72,50.55 32.12,50.05 31.72,49.55 31.22,49.05 30.72,48.55 28.52,45.85 28.52,45.15 28.52,44.45 28.52,43.75 28.32,43.05 31.22,47.05 31.72,47.55 32.22,48.05 32.72,48.55 33.22,49.05 33.72,49.55 34.22,50.05 34.72,50.55 35.22,51.05 35.72,51.55 29.92,45.35 29.92,44.65 30.52,44.65 6.22,46.05 6.52,44.65 4.32,43.05 8.12,43.05 32.12,43.05 18.22,27.7 18.22,29.2 18.22,26.2 19.22,26.2 20.22,26.2 19.22,27.7 20.32,27.8 19.22,29.2 21.22,26.2 11.22,26.2 10.22,26.2 9.22,26.2 8.22,26.2 8.22,24.95 8.22,23.95 9.97,24.45 23.72,51.55 23.22,51.05 22.72,50.55 22.32,50.05 22.72,49.55 20.72,49.55 20.22,50.05 19.72,50.55 19.22,51.05 18.72,51.55 18.52,24.9 19.92,24 21.22,34.85 21.22,33.65 21.22,32.45 21.22,31.25 21.02,28.45
  pour Top (isolate 0.152, no thermals): 0.02,56.9 45.72,56.9 45.72,53.21 48.89,53.21 48.89,3.68 45.72,3.68 45.72,0 0.02,0
  pour Bottom (isolate 0.152, no thermals): 0.02,56.9 45.72,56.9 45.72,53.21 48.89,53.21 48.89,3.68 45.72,3.68 45.72,0 0.02,0
  pour Route2 (isolate 0.152, rank 3, no thermals): 0.02,56.9 45.72,56.9 45.72,53.21 48.39,53.21 48.39,3.68 45.72,3.68 45.72,0 0.02,0
  pour Route15 (isolate 0.152, no thermals): 0.02,56.9 45.72,56.9 45.72,53.21 48.39,53.21 48.39,3.68 45.72,3.68 45.72,0 0.02,0
GND2  (3 unrouted)
  Top 0.2: 12.87,29.2 11.68,29.2 | 12.87,27.7 11.68,27.7 | 12.87,24.7 11.68,24.7 | 12.87,26.2 11.68,26.2
I2C_V  (via drill 0.2)
  Top 0.152: v42.55,28.9 42.55,29.59 arc-90 42.8,29.84 U1.8 43.05,30.83 arc-45 43.2,31.18 43.41,31.39 arc45 43.56,31.75 43.56,33.83 arc-45 43.71,34.19 44.07,34.55 arc-45 44.42,34.7 47.26,34.7 arc45 47.53,34.81 47.84,35.12 arc-45 48.11,35.23 PCIE-NORTH.B3
  Bottom 0.152: v42.55,28.9 C1.1 R1.1
MGT_CLK0_N
  Top 0.152: JM1.4 12.07,31.2 11.97,31.3
MGT_CLK0_P
  Top 0.152: JM1.2 12.07,31.7 11.97,31.6
MGT_RX0_N
  Top 0.152: JM1.21 17.37,26.7 17.47,26.8 20.12,26.8 arc90 22.17,28.95 22.17,35.95 22.22,36 U2.27
MGT_RX0_P
  Top 0.152: JM1.19 17.37,27.2 17.47,27.1 20.12,27.1 arc90 21.87,28.95 21.87,29.15 arc90 21.77,29.25 arc-90 21.67,29.35 21.67,29.55 arc-90 21.77,29.65 arc90 21.87,29.75 21.87,29.95 arc90 21.77,30.05 arc-90 21.67,30.15 21.67,30.35 arc-90 21.77,30.45 arc90 21.87,30.55 21.87,35.95 21.82,36 U2.26
MGT_RX1_N
  Top 0.152: JM1.15 17.37,28.2 17.47,28.3 19.52,28.3 arc90 20.57,29.45 20.57,35.95 20.62,36 U2.23
MGT_RX1_P
  Top 0.152: JM1.13 17.37,28.7 17.47,28.6 19.52,28.6 arc90 20.27,29.45 20.27,29.65 arc90 20.17,29.75 arc-90 20.07,29.85 20.07,30.05 arc-90 20.17,30.15 arc90 20.27,30.25 20.27,30.45 arc90 20.17,30.55 arc-90 20.07,30.65 20.07,30.85 arc-90 20.17,30.95 arc90 20.27,31.05 20.27,35.95 20.22,36 U2.22
MGT_TX0_N  (via drill 0.2)
  Top 0.152: JM1.28 12.07,25.2 11.97,25.3 11.47,25.3 arc90 11.37,25.2 arc-90 11.27,25.1 11.02,25.1 arc-90 10.92,25.2 arc90 10.82,25.3 10.57,25.3 arc90 10.47,25.2 arc-90 10.37,25.1 10.12,25.1 arc-90 10.02,25.2 arc90 9.92,25.3 9.72,25.3 arc90 9.07,24.55 v9.23,24.45 | v18.91,24.45 19.07,24.55 arc-90 20.22,25.6 22.13,25.6 arc90 22.28,25.75 arc-90 22.43,25.91 22.61,25.91 arc-90 22.77,25.75 arc90 22.92,25.6 23.04,25.6 arc45 23.75,25.89 30.57,32.72 arc45 30.87,33.42 30.87,33.58 arc90 30.77,33.68 30.76,33.68 arc-90 30.66,33.78 30.66,34.05 arc-90 30.76,34.15 30.77,34.15 arc90 30.87,34.25 30.87,35.95 30.82,36 U4.6
  Bottom 0.152: v9.23,24.45 9.07,24.35 9.07,24.25 arc90 9.72,23.6 9.92,23.6 arc90 10.02,23.7 arc-90 10.12,23.8 10.37,23.8 arc-90 10.47,23.7 arc90 10.57,23.6 10.82,23.6 arc90 10.92,23.7 arc-90 11.02,23.8 11.27,23.8 arc-90 11.37,23.7 arc90 11.47,23.6 12.72,23.6 18.22,23.6 arc90 19.07,24.35 v18.91,24.45
MGT_TX0_P  (via drill 0.2)
  Top 0.152: JM1.26 12.07,25.7 11.97,25.6 9.72,25.6 arc90 8.77,24.55 v8.62,24.45 | v19.52,24.45 19.37,24.55 arc-90 20.22,25.3 23.17,25.3 arc45 23.88,25.59 30.88,32.59 arc45 31.17,33.3 31.17,35.95 31.22,36 U4.7
  Bottom 0.152: v8.62,24.45 8.77,24.35 8.77,24.25 arc90 9.72,23.3 18.22,23.3 arc90 19.37,24.35 v19.52,24.45
MGT_TX1_N
  Top 0.152: JM1.22 12.07,26.7 11.97,26.8 9.72,26.8 arc-90 6.87,29.85 6.87,36 6.82,36.05 U3.6
MGT_TX1_P
  Top 0.152: JM1.20 12.07,27.2 11.97,27.1 9.72,27.1 arc-90 7.17,29.85 7.17,30.15 arc-90 7.27,30.25 arc90 7.37,30.35 7.37,30.55 arc90 7.27,30.65 arc-90 7.17,30.75 7.17,30.95 arc-90 7.27,31.05 arc90 7.37,31.15 7.37,31.35 arc90 7.27,31.45 arc-90 7.17,31.55 7.17,36 7.22,36.05 U3.7
N$1
  Bottom 0.152: R4.2 D1.C@1
N$2
  Bottom 0.152: R5.2 D2.C@1
N$3
  Bottom 0.152: R6.2 D3.C@1
N$4
  Bottom 0.152: R7.2 D4.C@1
N$5
  cutout Route2: 17.42,26.45 15.72,26.45 15.72,27.45 17.42,27.45
  cutout Route2: 17.42,27.95 15.72,27.95 15.72,28.95 17.42,28.95
  cutout Route2: 17.42,29.45 15.72,29.45 15.72,30.45 17.42,30.45
  cutout Route2: 17.42,30.95 15.72,30.95 15.72,31.95 17.42,31.95
  cutout Route2: 12.02,30.45 13.72,30.45 13.72,29.45 12.02,29.45
  cutout Route2: 12.02,28.95 13.72,28.95 13.72,27.95 12.02,27.95
  cutout Route2: 12.02,27.45 13.72,27.45 13.72,26.45 12.02,26.45
  cutout Route2: 12.02,25.95 13.72,25.95 13.72,24.95 12.02,24.95
  cutout Route2: 12.02,31.95 13.72,31.95 13.72,30.95 12.02,30.95
  cutout Route2: 39.42,33.95 37.72,33.95 37.72,37.95 39.42,37.95
  cutout Route2: 39.42,21.45 37.72,21.45 37.72,24.45 39.42,24.45
  cutout Route2: 39.42,17.45 37.72,17.45 37.72,19.45 39.42,19.45
  cutout Route2: 39.42,13.95 37.72,13.95 37.72,16.95 39.42,16.95
  cutout Route2: 34.02,19.95 35.72,19.95 35.72,17.45 34.02,17.45
  cutout Route2: 34.02,15.45 35.72,15.45 35.72,12.95 34.02,12.95
  cutout Route2: 34.02,16.95 35.72,16.95 35.72,15.95 34.02,15.95
  cutout Route2: 34.02,24.45 35.72,24.45 35.72,23.45 34.02,23.45
  cutout Route2: 17.42,7.95 15.72,7.95 15.72,10.95 17.42,10.95
  cutout Route2: 12.02,13.45 13.72,13.45 13.72,11.45 12.02,11.45
N$6
  cutout Route15: 8.67,31.81 9.17,31.81 9.17,31.59 8.67,31.59
  cutout Route15: 8.67,31.31 9.17,31.31 9.17,31.09 8.67,31.09
  cutout Route15: 8.03,31.7 8.03,31.2 7.81,31.2 7.81,31.7
  cutout Route15: 5.57,32.37 6.57,32.37 6.57,31.47 5.57,31.47
  cutout Route15: 5.57,31.1 6.57,31.1 6.57,30.6 5.57,30.6
N$7
  Top 0.152: U2.40 23.82,41.65 C3.2
N$8
  Top 0.152: U2.39 23.82,41.25 C3.1
N$9
  Top 0.152: U3.40 3.5,37.25 C21.2
N$10
  Top 0.152: U3.39 3.5,37.65 C21.1
N$11  (via drill 0.2)  (1 unrouted)
  Top 0.178: U2.30 24.02,37.65 v24.22,37.85
N$12  (via drill 0.2)  (1 unrouted)
  Top 0.178: U2.34 24.02,39.25 v24.22,39.45
N$13
  Bottom 0.203: C18.2 R9.1
N$14  (via drill 0.2)
  Top 0.152: U3.22 7.22,41.85 v7.02,41.65
  Bottom 0.178: C18.1 7.42,41.9 arc-90 7.17,41.65 v7.02,41.65
N$15
  Top 0.178: U3.23 6.82,42.75 7.22,43.15 C19.1
N$16
  Top 0.178: C19.2 R10.1
N$17  (via drill 0.2)
  Top 0.152: U3.26 5.62,41.85 v5.42,41.65
  Bottom 0.203: v5.42,41.65 5.27,41.65 arc-90 5.02,41.9 C20.1
N$18
  Bottom 0.203: R11.1 C20.2
N$19  (1 unrouted)
N$20  (via drill 0.2)  (1 unrouted)
  Top 0.178: U2.3 21.82,42.85 v21.62,43.05
N$21  (via drill 0.2)
  Top 0.152: U3.30 3.42,41.25 v3.22,41.05
  Bottom 0.203: C24.1 v3.22,41.05
N$22  (via drill 0.2)
  Top 0.152: U3.34 3.42,39.65 v3.22,39.45
  Bottom 0.203: C23.1 v3.22,39.45
N$23
  Top 0.178: U3.27 5.22,45.63 arc-45 5.51,46.34 8.93,49.75 arc45 9.22,50.46
  Top 0.203: 9.22,50.46 C17.1
N$24  (via drill 0.2)
  Top 0.152: U3.5 6.42,37.05 v6.62,37.25
  Bottom 0.203: C22.1 v6.62,37.25
N$25  (1 unrouted)
N$28
  Top 0.152: U3.33 3.02,40.05 2.42,39.45 2.42,36.25
N$29
  Top 0.152: U3.36 3.92,38.85 3.32,38.25 3.02,38.25 2.82,38.05 2.82,36.25
N$34
  Top 0.152: U3.32 2.22,40.45 1.72,39.95
N$36
  cutout Top: 23.32,57.05 19.12,57.05 19.12,52.06 arc45 19.41,51.36 21.12,49.65 22.12,49.65 22.07,49.7 arc-45 21.92,50.06 arc-45 22.06,50.38 23.03,51.36 arc45 23.32,52.06
N$37
  Top 0.178: U2.2 22.23,44.94 22.23,48.62 arc45 21.94,49.33 21.51,49.75 arc-45 21.22,50.46
  Top 0.203: 21.22,50.46 C2.2
N$38  (1 unrouted)
N$57
  cutout Top: 7.12,57.05 11.32,57.05 11.32,52.06 arc-45 11.03,51.36 9.32,49.65 8.32,49.65 8.37,49.7 arc45 8.52,50.06 arc45 8.38,50.38 7.41,51.36 arc-45 7.12,52.06
N$58
  Top 0.178: U4.27 29.22,45.63 arc-45 29.51,46.34 32.93,49.75 arc45 33.22,50.46
  Top 0.203: 33.22,50.46 C35.1
N$59  (1 unrouted)
N$63
  cutout Top: 31.12,57.05 35.32,57.05 35.32,52.06 arc-45 35.03,51.36 33.32,49.65 32.32,49.65 32.37,49.7 arc45 32.52,50.06 arc45 32.38,50.38 31.41,51.36 arc-45 31.12,52.06
N$78
  Top 0.152: 27.5,37.25 C39.2
  Top 0.178: U4.40 27.5,37.25
N$81
  Top 0.152: U4.32 26.22,40.45 25.72,39.95 25.72,34.45
N$86
  Top 0.152: U4.36 27.92,38.85 27.32,38.25 27.02,38.25 26.82,38.05 26.82,36.25
N$87
  Top 0.152: U4.33 27.02,40.05 26.42,39.45 26.42,36.25
N$90  (via drill 0.2)
  Top 0.178: U4.5 30.42,37.05 v30.62,37.25
  Bottom 0.203: C40.1 v30.62,37.25
N$91  (via drill 0.2)
  Top 0.152: U4.34 27.42,39.65 v27.22,39.45
  Bottom 0.203: C41.1 v27.22,39.45
N$92  (via drill 0.2)
  Top 0.178: U4.30 27.42,41.25 v27.22,41.05
  Bottom 0.203: C42.1 v27.22,41.05
N$93
  Bottom 0.203: R14.1 C38.2
N$94  (via drill 0.2)
  Top 0.178: U4.26 29.62,41.85 v29.42,41.65
  Bottom 0.203: v29.42,41.65 29.27,41.65 arc-90 29.02,41.9 C38.1
N$95
  Top 0.178: C37.2 R13.1
N$96
  Top 0.178: U4.23 30.82,42.75 31.22,43.15 C37.1
N$97  (via drill 0.2)
  Top 0.178: U4.22 31.22,41.85 v31.02,41.65
  Bottom 0.178: C36.1 31.42,41.9 arc-90 31.17,41.65 v31.02,41.65
N$98
  Bottom 0.203: C36.2 R12.1
N$99
  Top 0.152: 27.5,37.65 C39.1
  Top 0.178: U4.39 27.5,37.65
N$216  (via drill 0.2)
  Top 0.152: U1.7 v43.56,30.61
  Bottom 0.152: R2.1 R1.2 44.14,30.35 arc90 43.88,30.61 v43.56,30.61
N_IO0
  Top 0.152: PCIE-NORTH.B4 48.42,36.23 arc-45 48.24,36.31 48.04,36.51 arc45 47.87,36.58 46.95,36.58 arc45 46.67,36.47 46.43,36.23 arc-45 46.08,36.08 43.24,36.08
N_IO1
  Top 0.152: PCIE-NORTH.B5 48.42,37.23 arc45 48.24,37.16 48.04,36.96 arc-45 47.87,36.89 46.86,36.89 arc45 46.51,36.74 46.27,36.51 arc-45 45.99,36.39 43.15,36.39
N_IO2
  Top 0.152: PCIE-NORTH.B6 48.11,38.23 arc45 47.93,38.16 47.79,38.02 arc-45 47.62,37.95 42.93,37.95
N_IO3
  Top 0.152: PCIE-NORTH.B7 48.04,39.23 arc-45 47.86,39.31 47.79,39.38 arc45 47.62,39.45 43.43,39.45
N_IO4
  Top 0.152: PCIE-NORTH.B8 48.04,40.23 arc-45 47.86,40.31 47.79,40.38 arc45 47.62,40.45 43.43,40.45
N_IO5
  Top 0.152: PCIE-NORTH.B9 48.11,41.23 arc45 47.93,41.16 47.79,41.02 arc-45 47.62,40.95 42.93,40.95
N_IO6
  Top 0.152: PCIE-NORTH.B10 48.42,42.23 arc-45 48.24,42.31 48.04,42.51 arc45 47.87,42.58 44.58,42.58
N_IO7
  Top 0.152: PCIE-NORTH.B11 48.42,43.23 arc45 48.24,43.16 48.04,42.96 arc-45 47.87,42.89 44.66,42.89
N_LVDS0_N
  Bottom 0.152: PCIE-NORTH.A3 48.37,35.23 arc45 48.19,35.16 47.99,34.96 arc-45 47.82,34.89 44.65,34.89 arc45 44.3,34.74
N_LVDS0_P
  Bottom 0.152: 44.45,34.47 arc-45 44.74,34.58 47.82,34.58 arc-45 47.99,34.51 48.19,34.31 arc45 48.37,34.23 PCIE-NORTH.A2
N_LVDS1_N
  Bottom 0.152: PCIE-NORTH.A6 48.37,38.23 arc45 48.19,38.16 47.99,37.96 arc-45 47.82,37.89 44.65,37.89 arc45 44.3,37.74
N_LVDS1_P
  Bottom 0.152: PCIE-NORTH.A5 48.37,37.23 arc-45 48.19,37.31 47.99,37.51 arc45 47.82,37.58 44.74,37.58 arc45 44.45,37.47
N_LVDS2_N
  Bottom 0.152: PCIE-NORTH.A9 48.37,41.23 arc45 48.19,41.16 47.99,40.96 arc-45 47.82,40.89
N_LVDS2_P
  Bottom 0.152: PCIE-NORTH.A8 48.37,40.23 arc-45 48.19,40.31 47.99,40.51 arc45 47.82,40.58
N_LVDS3_N
  Bottom 0.152: PCIE-NORTH.A14 48.37,48.24 arc45 48.19,48.16 47.99,47.96 arc-45 47.82,47.89 44.65,47.89
N_LVDS3_P
  Bottom 0.152: PCIE-NORTH.A13 48.37,47.24 arc-45 48.19,47.31 47.99,47.51 arc45 47.82,47.58 44.74,47.58
N_LVDS4_N
  Bottom 0.152: PCIE-NORTH.A17 48.37,51.24 arc45 48.19,51.16 47.99,50.96 arc-45 47.82,50.89 44.25,50.89
N_LVDS4_P
  Bottom 0.152: 44.34,50.58 47.82,50.58 arc-45 47.99,50.51 48.19,50.31 arc45 48.37,50.24 PCIE-NORTH.A16
N_LVDS5_N
  Top 0.152: PCIE-NORTH.B17 48.37,51.24 arc45 48.19,51.16 47.99,50.96 arc-45 47.82,50.89
N_LVDS5_P
  Top 0.152: PCIE-NORTH.B16 48.37,50.24 arc-45 48.19,50.31 47.99,50.51 arc45 47.82,50.58
N_PCIE_V
  Top 0.61: PCIE-NORTH.B13 45.43,47.24
OUT_N
  Bottom 0.152: U5.5 6.92,30.85 7.24,31.17 R15.2 8.61,31.17 C55.1
OUT_P
  Bottom 0.152: 6.14,31.85 U5.4 6.19,31.92 6.38,31.73 R15.1 8.61,31.73 C54.1
S_IO0
  Top 0.152: PCIE-SOUTH.B4 48.11,7.66 arc-45 47.93,7.73 47.79,7.88 arc45 47.62,7.95 44.93,7.95
S_IO1
  Top 0.152: PCIE-SOUTH.B5 48.11,8.66 arc-45 47.93,8.73 47.79,8.88 arc45 47.62,8.95 44.93,8.95
S_IO2
  Top 0.152: PCIE-SOUTH.B6 48.04,9.66 arc45 47.86,9.59 47.79,9.52 arc-45 47.62,9.45 44.43,9.45
S_IO3
  Top 0.152: PCIE-SOUTH.B7 48.42,10.66 arc-45 48.24,10.73 48.04,10.93 arc45 47.87,11.01 46.95,11.01 arc45 46.67,10.89 46.43,10.66 arc-45 46.08,10.51 43.15,10.51
S_IO4
  Top 0.152: PCIE-SOUTH.B8 48.42,11.66 arc45 48.24,11.59 48.04,11.39 arc-45 47.87,11.31 46.86,11.31 arc45 46.51,11.17 46.27,10.93 arc-45 45.99,10.81 43.24,10.81
S_IO5
  Top 0.152: PCIE-SOUTH.B9 48.04,12.66 arc45 47.86,12.59 47.79,12.52 arc-45 47.62,12.45 44.43,12.45
S_IO6
  Top 0.152: PCIE-SOUTH.B10 48.11,13.66 arc-45 47.93,13.73 47.79,13.88 arc45 47.62,13.95 43.93,13.95
S_IO7
  Top 0.152: PCIE-SOUTH.B11 48.04,14.66 arc45 47.86,14.59 47.79,14.52 arc-45 47.62,14.45 44.43,14.45
S_LVDS0_N
  Bottom 0.152: PCIE-SOUTH.A3 48.38,6.66 arc45 48.2,6.59 47.99,6.38 arc-45 47.82,6.3
S_LVDS0_P
  Bottom 0.152: PCIE-SOUTH.A2 48.36,5.66 arc-45 48.18,5.73 47.99,5.93 arc45 47.82,6
S_LVDS1_N
  Bottom 0.152: PCIE-SOUTH.A6 48.38,9.66 arc45 48.2,9.59 47.99,9.38 arc-45 47.82,9.3
S_LVDS1_P
  Bottom 0.152: PCIE-SOUTH.A5 48.36,8.66 arc-45 48.18,8.73 47.99,8.93 arc45 47.82,9
S_LVDS2_N
  Bottom 0.152: PCIE-SOUTH.A9 48.38,12.66 arc45 48.2,12.59 47.99,12.38 arc-45 47.82,12.3
S_LVDS2_P
  Bottom 0.152: PCIE-SOUTH.A8 48.36,11.66 arc-45 48.18,11.73 47.99,11.93 arc45 47.82,12
S_LVDS3_N
  Bottom 0.152: PCIE-SOUTH.A14 48.28,19.66 47.92,19.3 44.07,19.3
S_LVDS3_P
  Bottom 0.152: PCIE-SOUTH.A13 48.26,18.66 47.92,19 44.19,19
S_LVDS4_N
  Bottom 0.152: PCIE-SOUTH.A17 48.28,22.66 47.92,22.3 44.25,22.3
S_LVDS4_P
  Bottom 0.152: PCIE-SOUTH.A16 48.26,21.66 47.92,22 44.16,22
S_LVDS5_N
  Top 0.152: PCIE-SOUTH.B17 48.38,22.66 arc45 48.2,22.59 47.99,22.38 arc-45 47.82,22.3
S_LVDS5_P
  Top 0.152: PCIE-SOUTH.B16 48.36,21.66 arc-45 48.18,21.73 47.99,21.93 arc45 47.82,22
S_PCIE_V
  Top 0.61: PCIE-SOUTH.B13 44.47,18.66
SCL
  Top 0.152: U1.6 44.07,33.73 arc-90 44.58,34.23 PCIE-NORTH.B2
SDA
  Top 0.152: U1.5 44.57,33.55 arc-90 44.83,33.8 47.24,33.8 arc-45 47.51,33.69 47.86,33.35 arc45 48.13,33.23 PCIE-NORTH.B1
VCC_4  (via drill 0.2)  (5 unrouted)
  Top 0.178: U2.4 v21.42,41.65 | U2.35 23.82,39.65 v24.22,40.05
VCC_8  (via drill 0.2)  (3 unrouted)
  Top 0.152: U3.4 v6.02,37.25 | U3.35 3.62,39.25 v3.22,38.85
  Bottom 0.203: C31.1 v3.22,38.85 | C30.1 v6.02,37.25
VCC_9  (via drill 0.2)  (3 unrouted)
  Top 0.178: U4.4 v30.02,37.25 | U4.35 27.62,39.25 v27.22,38.85
  Bottom 0.203: C49.1 v27.22,38.85 | C48.1 v30.02,37.25
VCCIO0  (via drill 0.25)
  Top 0.254: JM2.53 v37.47,24.7
  Bottom 0.254: 37.22,19.25 37.22,24.45 v37.47,24.7
VCCIO34  (via drill 0.25)
  Top 0.254: JM1.61 v15.47,16.7
VCCO_4  (via drill 0.2)  (5 unrouted)
  Top 0.178: U2.24 21.02,37.15 v20.92,37.25 | U2.25 21.42,37.15 v21.52,37.25
VCCO_8  (via drill 0.2)  (3 unrouted)
  Top 0.178: U3.25 6.02,42.95 v5.92,43.05 | U3.24 6.42,42.95 v6.52,43.05
  Bottom 0.178: C33.1 v5.92,43.05
  Bottom 0.203: C34.1 v6.52,43.05
VCCO_9  (via drill 0.2)  (3 unrouted)
  Top 0.178: U4.25 30.02,42.95 v29.92,43.05 | U4.24 30.42,42.95 v30.52,43.05
  Bottom 0.178: C51.1 v29.92,43.05
  Bottom 0.203: C52.1 v30.52,43.05
VDD_4  (via drill 0.2)  (7 unrouted)
  Top 0.178: U2.20 v18.22,37.25 | U2.16 v18.22,38.85 | U2.29 v24.22,37.25
VDD_8  (via drill 0.2)  (4 unrouted)
  Top 0.152: U3.16 v9.22,40.05 | U3.20 v9.22,41.65 | U3.29 v3.22,41.65
  Bottom 0.203: v9.22,41.65 C27.1 | v9.22,40.05 C28.1 | C26.1 v3.22,41.65
VDD_9  (via drill 0.2)  (4 unrouted)
  Top 0.178: U4.16 v33.22,40.05 | U4.20 v33.22,41.65 | U4.29 v27.22,41.65
  Bottom 0.203: v33.22,41.65 C45.1 | v33.22,40.05 C46.1 | C44.1 v27.22,41.65
VIN  (via drill 0.51)  (1 unrouted)
  Top 0.203: JM1.99 17.92,7.2 | JM1.97 17.42,7.7 18.22,6.9
  Top 0.813: 18.22,3.95 v18.22,6.45 18.22,6.9 17.92,7.2
VXX  (2 unrouted)
  Bottom 0.305: 6.14,29.85 U5.6

## Text on the board
_tsilk: V0.4 / R1.0 | VIN | TMS | TDI | TDO | TCK | GND | VDD
_bsilk: Trenz TE0714 SDI / Dual Plugin Module | Copyright (C) 2017 Herbert Pötzl / Licensed under CERN OHL v.1.2
bEngrave: AXIOM BETA DPM TRENZ SDI / BOTTOM SIDE V0.4 R1.0